# EAGLE board boombox_power_high_amp (EAGLE 6.0)
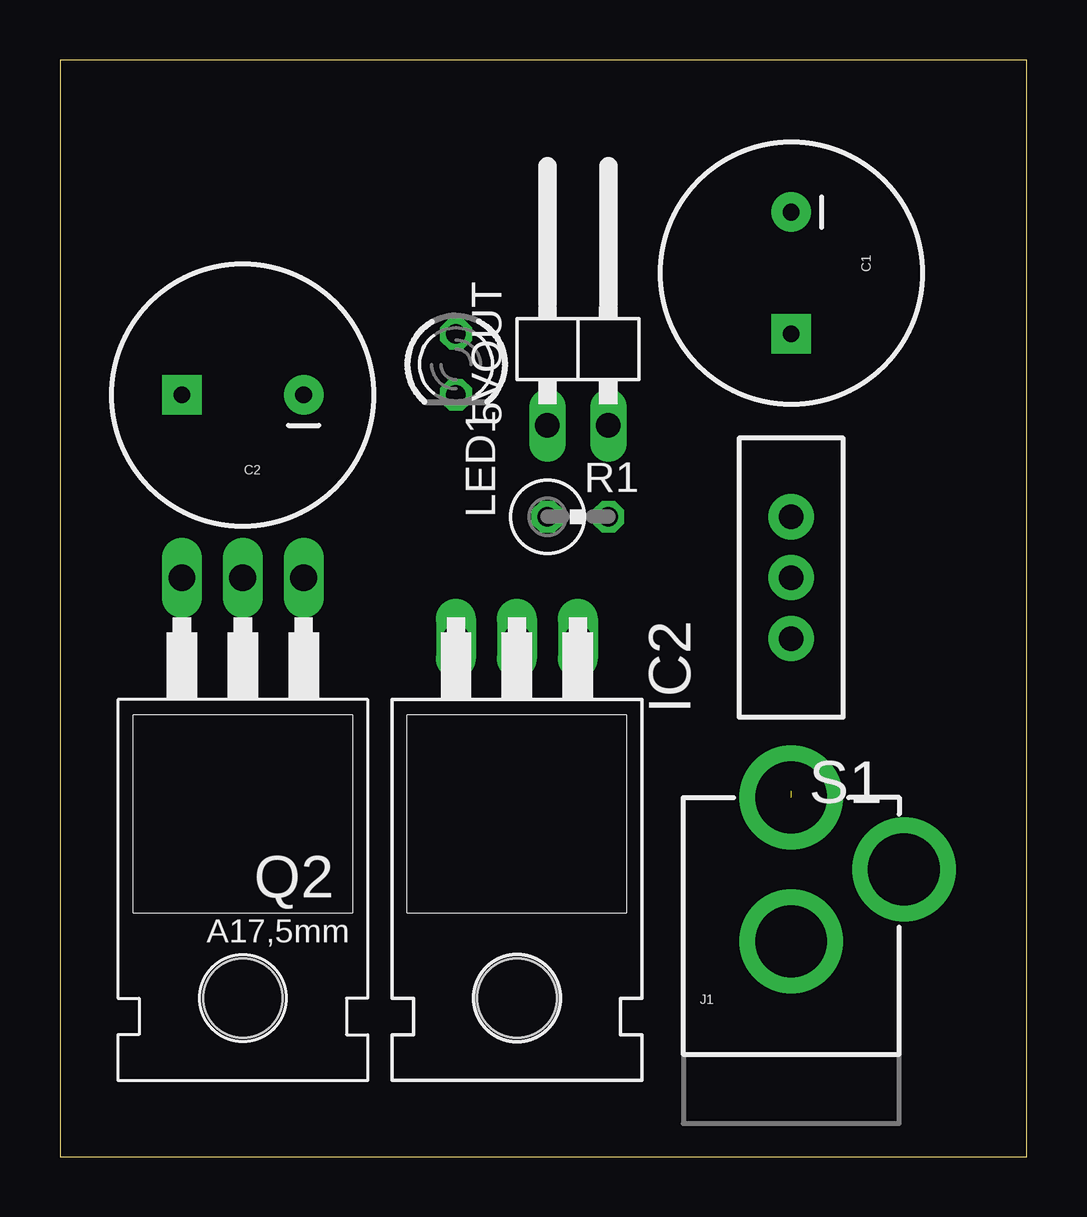
[diagram p0: board, top side]
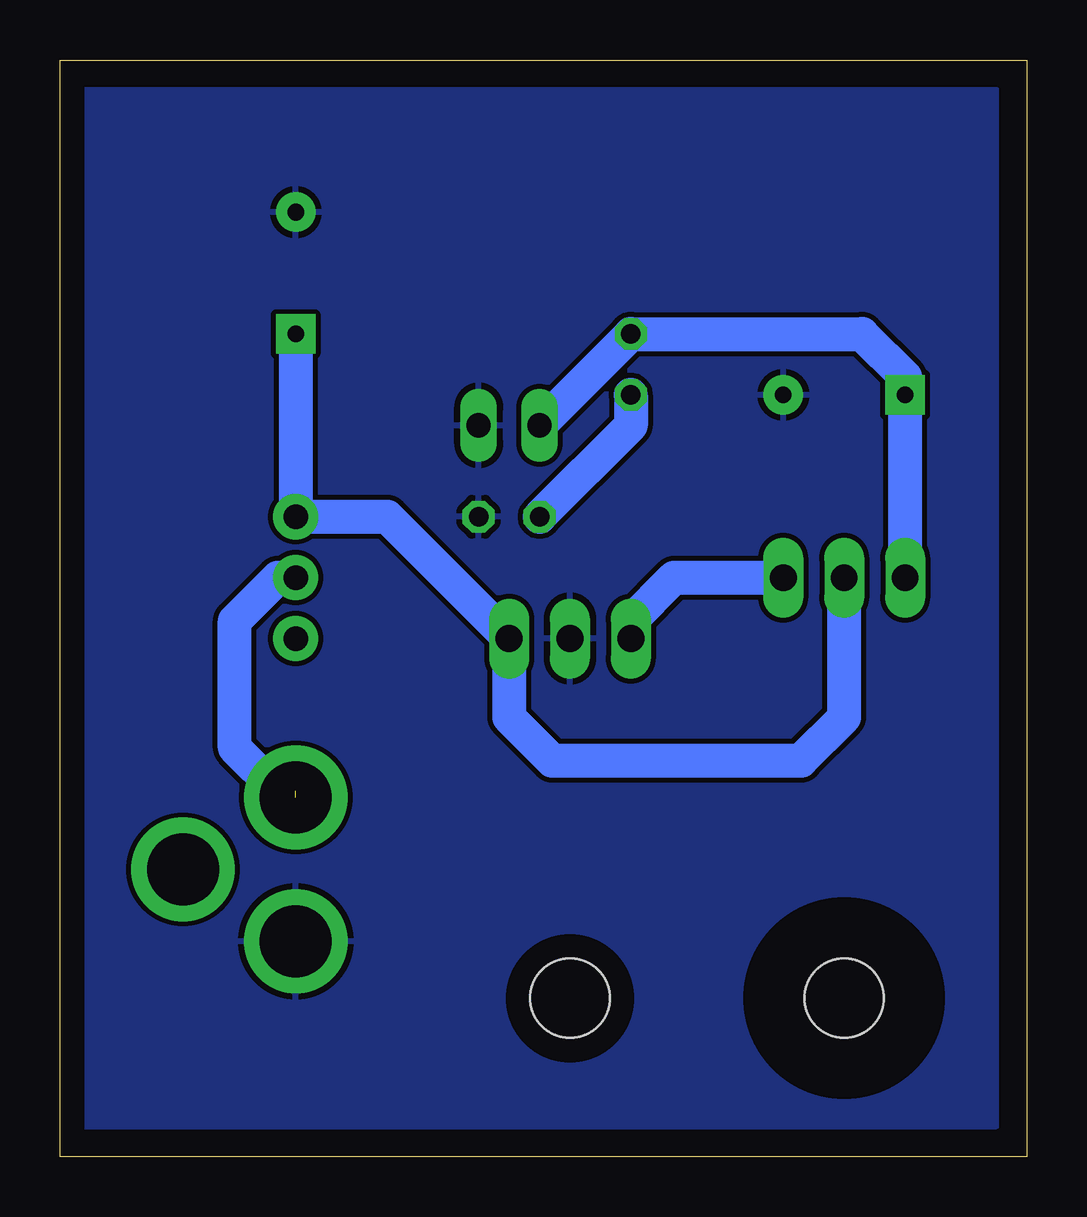
[diagram p1: board, bottom side, seen from below]

Size 40.31 x 45.71 mm. Coordinates in mm from the lower left corner, seen from the top.
Outline: 0,0 40.31,0 40.31,45.71 0,45.71 0,0
Copper layers (1*16): Top 0.035mm / dielectric 1.5mm / Bottom 0.035mm
Design rules: minimum track width 10mil, minimum drill 24mil, track to track 8mil, track to pad 8mil, pad to pad 8mil, via to via 8mil, smd to smd 8mil, copper to edge 40mil, drill to drill 8mil, minimum pad ring 10mil, minimum via ring 8mil, stop-mask expansion 4mil, vias tented up to drill 0mil, thermal gap 10mil

## Footprints (pad centres in the part's own frame; a part is rotated, then mirrored left to right if it is on the bottom)
1X02/90 = drill 1.016 long: 1 -1.27,-3.81; 2 1.27,-3.81
CPOL-RADIAL-1000UF-25V = drill 0.7 pad 1.651 square: 1 2.54,0 | drill 0.7 pad 1.651: 2 -2.54,0
TO220H = drill 1.118 long: 1 -2.54,-10.16; 2 0,-10.16; 3 2.54,-10.16 | hole 3.302: 0,4.826
POWER_JACK_PTH = drill 2.997 pad 4.318: GND 0,7.7; GNDBREAK 4.7,10.7; PWR 0,13.7
LED3MM = drill 0.813 octagon: A -1.27,0; K 1.27,0
TO220 = drill 1.118 long: 1 -2.54,-6.35; 2 0,-6.35; 3 2.54,-6.35 | hole 3.302: 0,11.176
0309V = drill 0.813 octagon: 1 -1.27,0; 2 1.27,0
SWITCH-SPDT = drill 1.016 pad 1.88: 1 0,2.54; 2 0,0; 3 0,-2.54

## Placement (x,y rotation side)
5VOUT  [1X02/90]  21.59,34.29 0 top
C1  2200uF  [CPOL-RADIAL-1000UF-25V]  30.48,36.83 270 top
C2  2200uF  [CPOL-RADIAL-1000UF-25V]  7.62,31.75 180 top
IC2  7805T  [TO220H]  19.05,11.43 180 top
J1  POWER_JACKPTH  [POWER_JACK_PTH]  30.48,1.27 0 top
LED1  [LED3MM]  16.51,33.02 270 top
Q2  BD243  [TO220]  7.62,17.78 180 top
R1  330R  [0309V]  21.59,26.67 0 top
S1  [SWITCH-SPDT]  30.48,24.13 180 top

## Library data of the parts
5VOUT = pinhead
C1 C2 J1 S1 = SparkFun
IC2 = linear
LED1 = led
Q2 = transistor-npn
R1 = resistor

## Nets
9V: C1.1 IC2.1 Q2.2 S1.3
GND: 5VOUT.2 C1.2 C2.2 IC2.2 J1.GND R1.2
N$1: J1.GNDBREAK
N$2: 5VOUT.1 C2.1 LED1.A Q2.3
N$3: LED1.K R1.1
N$5: J1.PWR S1.2
VCC: IC2.3 Q2.1

## Tracks (layer width: path | path; a pad name or v marks a point on that pad's centre or on a via)
9V
  Bottom 1.422: C1.1 S1.3 26.67,26.67 IC2.1 21.59,18.31 19.79,16.51 9.42,16.51 7.62,18.31 Q2.2
GND
  pour Bottom: 1.27,44.45 39.37,44.45 39.37,1.27 1.27,1.27
N$2
  Bottom 1.422: 5VOUT.1 LED1.A 6.88,34.29 5.08,32.49 C2.1 Q2.3
N$3
  Bottom 1.422: LED1.K 16.51,30.48 R1.1
N$5  (1 unrouted)
  Bottom 1.422: 30.48,15.24 31.22,15.24 33.02,17.04 33.02,22.33 31.22,24.13 S1.2
VCC
  Bottom 1.422: IC2.3 16.51,22.33 14.71,24.13 Q2.1